# Altium PCB 400059.PcbDoc
Units mil, origin at the board's own origin, x right, y up, seen from the top; angles counter-clockwise.
Board outline 1005.56 x 903.71 mil, 2 copper layers (Top Layer, Bottom Layer), stack 65.792 mil thick; 38 components, 33 nets, 149 pads, 33 vias.
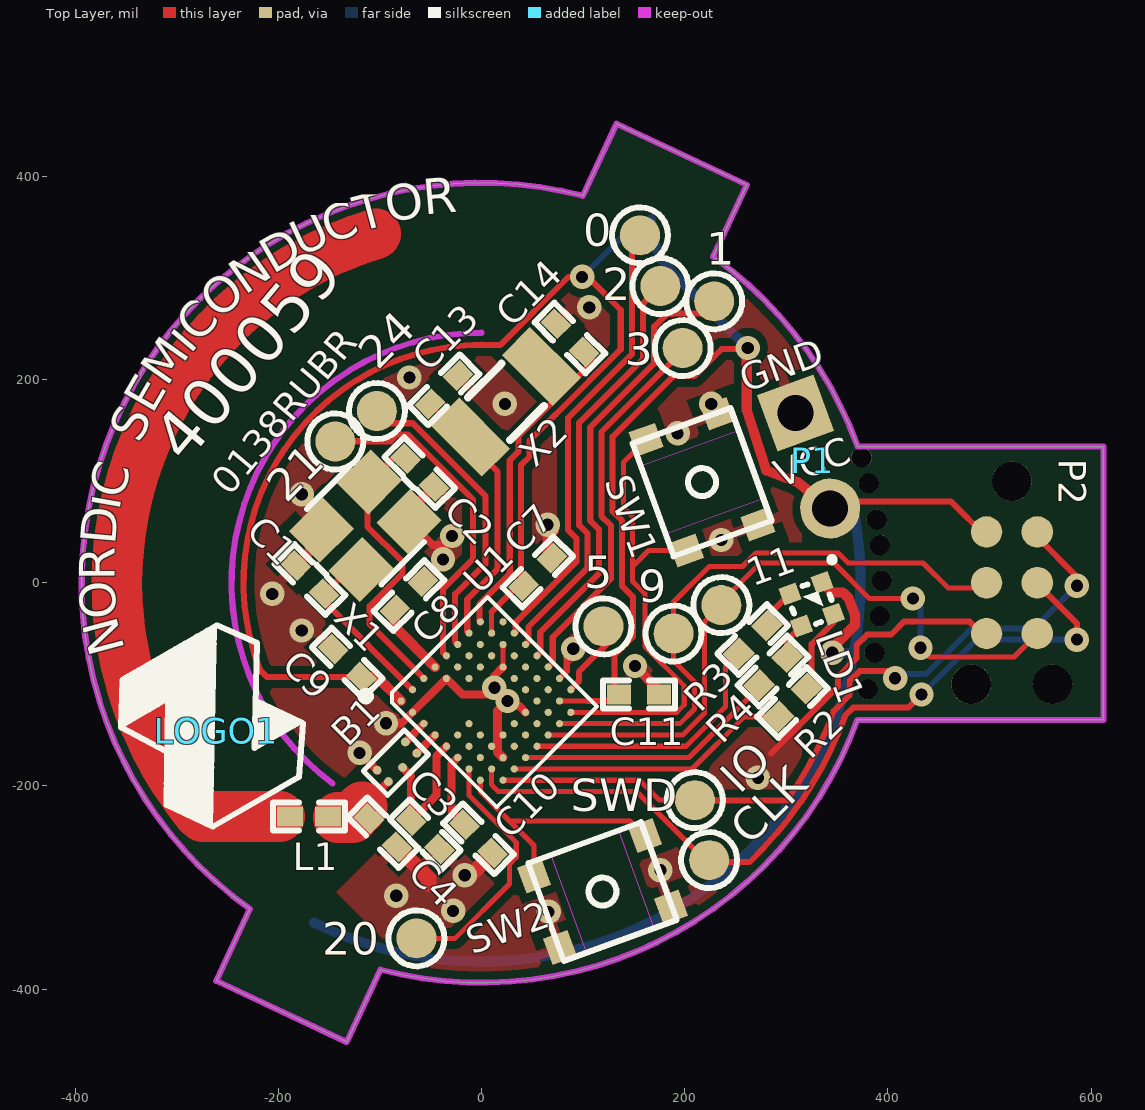
[diagram p0: Top Layer view]
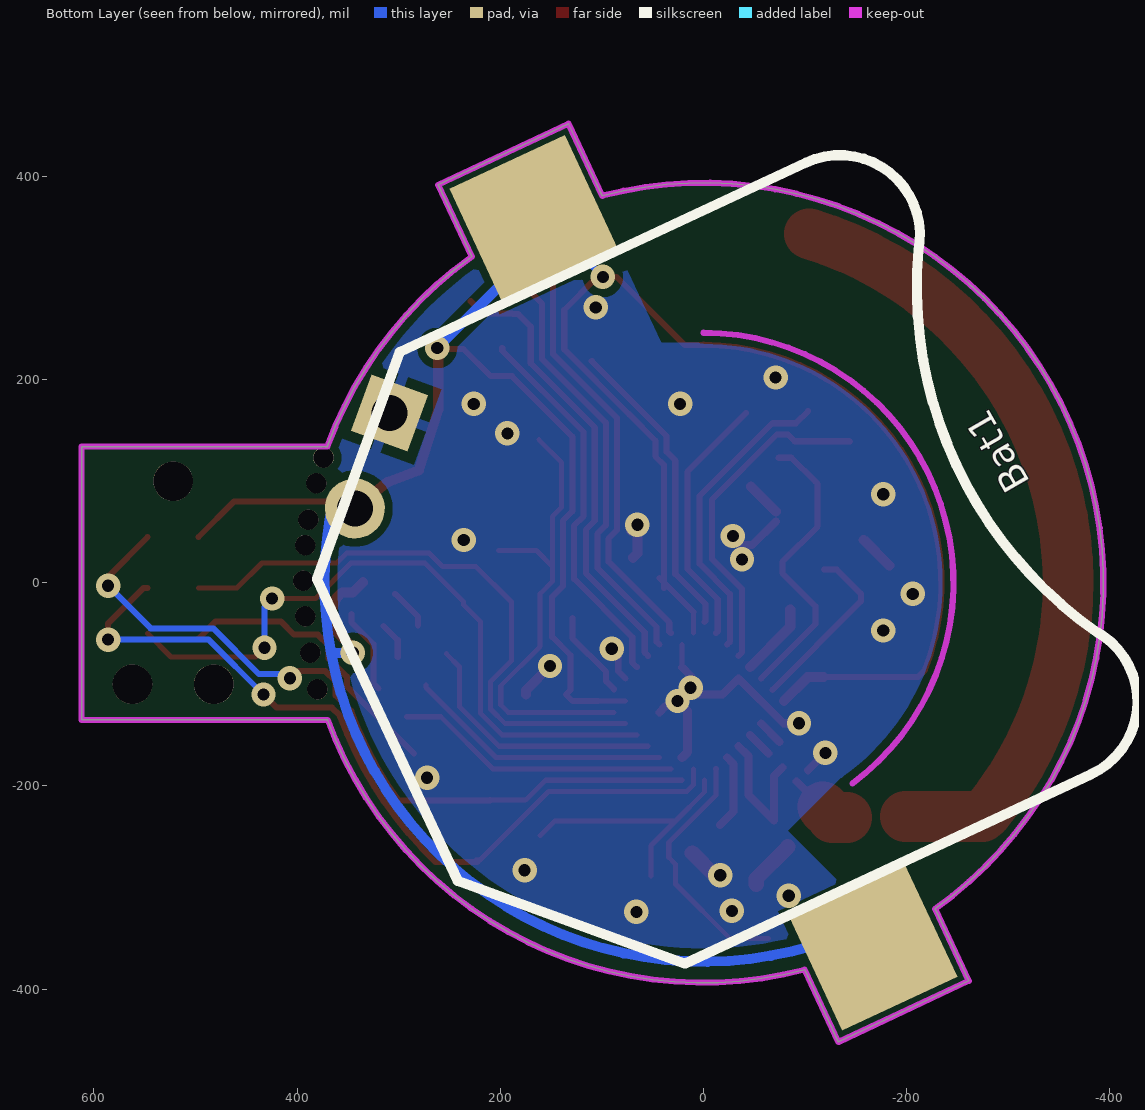
[diagram p1: Bottom Layer view, seen from below]
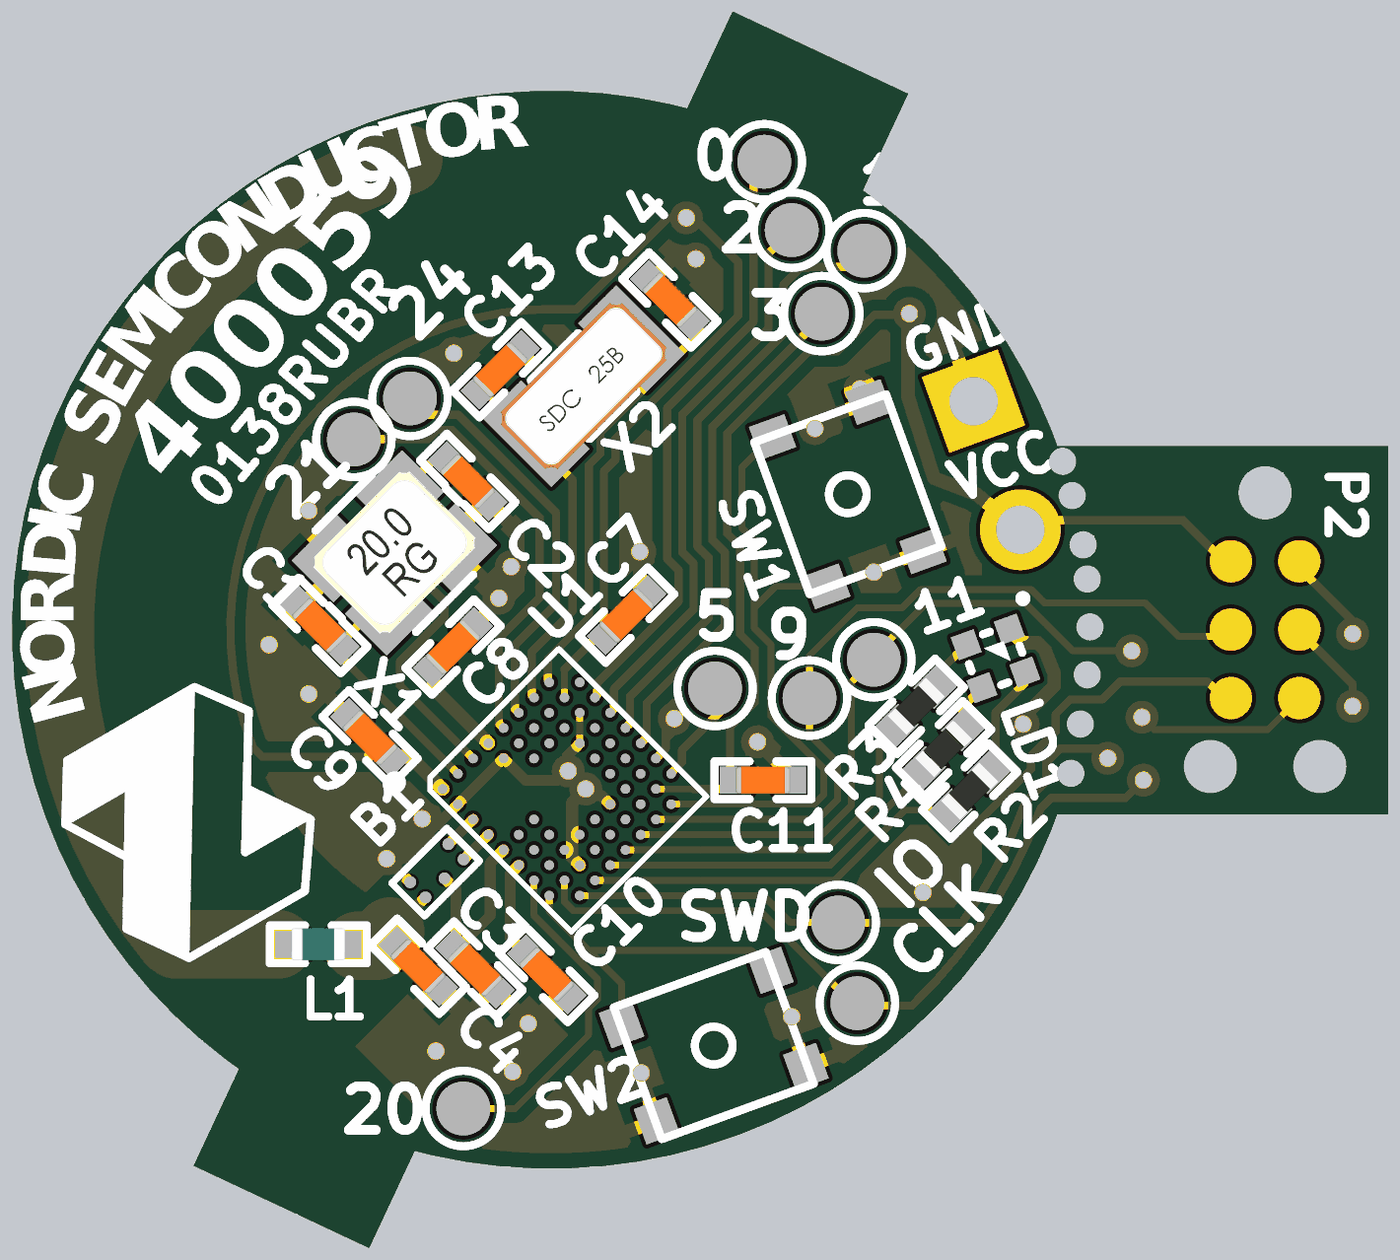
[diagram p2: 3D render of the assembled board from above, using the file's embedded part models]

## Layer stack, top to bottom
Top Layer: signal copper 1.4
Dielectric: core 62.9921, FR-4, Dk 4.8
Bottom Layer: signal copper 1.4

## Board outline
-261.11,-391.79 -132.83,-451.93 -99.54,-380.91 -99.54,-380.92 ccw(c0.15,-0.05) 370,-135 612,-135 612,134 370,134 370.17,134.06 ccw(c0,0) 227.95,321 261.07,391.65 132.79,451.78 99.5,380.77 99.54,380.91 ccw(c0,0) -227.95,-321 -227.99,-321.14

## Design rules (kind name [scope] priority, off if disabled: settings)
Clearance Polygon_Clearance [(InNamedPolygon('Top_Layer-GND')) or (InNamedPolygon('Bottom_Layer-GND'))] p1: gap=8
Clearance [All] p2: gap=5
ComponentClearance [All] p1 off: gap=10 collisioncheckmode=3 verticalgap=10 showdistances=FALSE
FabricationTestPointUsage TestPointUsage [All] p1: valid=0 allowmultiple=FALSE
FabricationTestpoint Testpoint [All] p1: side=3 testpointundercomponent=TRUE minsize=40 maxsize=100 preferedsize=60 minholesize=0 maxholesize=40 preferedholesize=32 testpointgrid=1 allowsidetop=TRUE allowsidebottom=TRUE usegrid=TRUE gridtolerance=0.01
Height [All] p1 off: minheight=0 maxheight=1000 prefheight=500
HoleSize [All] p1: absolutevalues=TRUE maxlimit=100 minlimit=12 maxpercent=80.000 minpercent=20.000
MinimumAnnularRing [All] p1 off: minimumring=8
PolygonConnect PolygonConnect_1 [isVia and innet(gnd)] p1: connectstyle=Direct reliefconductorwidth=10 reliefentries=4 polygonreliefangle="90 Angle" airgapwidth=10
PolygonConnect [All] p2: connectstyle=Relief reliefconductorwidth=10 reliefentries=4 polygonreliefangle="90 Angle" airgapwidth=10
RoutingVias [All] p1: holewidth=16 width=32 viastyle="Through Hole" minholewidth=10 minwidth=10 maxholewidth=28 maxwidth=50
SilkToSolderMaskClearance SilkscreenOverComponentPads [IsPad] p1: minsilkscreentomaskgap=10 clearancetoexposedcopper=TRUE
SolderMaskExpansion [All] p1: expansion=3
Width [All] p1: maxlimit=10000 minlimit=5 preferedwidth=6 bottomlayer_minwidth=6 minimp=50.000000 maximp=50.000000 favimp=50.000000
22 further rules are at their usual default settings.

## Components (designator, comment, footprint, x,y, rotation, side; value= is the part's Value field where it differs from the comment)
0 "Ø1.0mm,SMD" TP_SMD_Ø1.0mm 156,342 r0 top
1 "Ø1.0mm,SMD" TP_SMD_Ø1.0mm 229,277 r0 top
2 "Ø1.0mm,SMD" TP_SMD_Ø1.0mm 176,292 r0 top
3 "Ø1.0mm,SMD" TP_SMD_Ø1.0mm 198,231 r0 top
5 "Ø1.0mm,SMD" TP_SMD_Ø1.0mm 120,-43 r0 top
9 "Ø1.0mm,SMD" TP_SMD_Ø1.0mm 189,-50 r0 top
11 "Ø1.0mm,SMD" TP_SMD_Ø1.0mm 236,-22 r0 top
20 "Ø1.0mm,SMD" TP_SMD_Ø1.0mm -64,-350 r0 top
21 "Ø1.0mm,SMD" TP_SMD_Ø1.0mm -144,139 r0 top
24 "Ø1.0mm,SMD" TP_SMD_Ø1.0mm -103,169 r0 top
B1 "BAL-NRF02D3" BAL-ST-WLCSP -83.31,-176.24 r225 top
Bat1 "*" CR1632_HOLDER_SMD 0,0 r245 bottom locked
C1 "12pF" CAPC1005X04L -168.96,3.06 r315 top
C2 "12pF" CAPC1005X04L -60.77,108.42 r135 top
C3 "2.2nF" CAPC1005X04L -55.47,-248.03 r135 top
C4 "1.2pF" CAPC1005X04L -97,-246 r135 top
C7 "100nF" CAPC1005X04L 55.39,10.61 r225 top
C8 "100nF" CAPC1005X04L -71.56,-12.68 r45 top (schematic designator C10)
C9 "1.0nF" CAPC1005X04L -132.19,-78.97 r315 top (schematic designator C8)
C10 "47nF" CAPC1005X04L -3,-252 r135 top (schematic designator C11)
C11 "100nF" CAPC1005X04L 155,-110 r180 top (schematic designator C12)
C13 "12pF" CAPC1005X04L -37,190 r225 top
C14 "12pF" CAPC1005X04L 87,241 r315 top
CLK "Ø1.0mm,SMD" TP_SMD_Ø1.0mm 224,-273 r0 top
IO "Ø1.0mm,SMD" TP_SMD_Ø1.0mm 210,-214 r180 top
L1 "2.2nH" INDC1005X04L -170,-230 r180 top
LD1 "LED RGB" SML-LX0404SIUPGUSB 325,-21 r20 top
LOGO1 "Nordic Logo M" NORDIC_LOGO_M -261.04,-145.74 r120 top (schematic designator LOGO)
P1 "Pin List 1x2" LIST_1x2 326,120 r290 top locked
P2 "TC2030-CTX-NL" TC2030-IDC-NLFP 522,0 r270 top
R2 "2k2" RESC1005X04L 306,-118 r45 top
R3 "680R" RESC1005X04L 267,-56 r45 top
R4 "820R" RESC1005X04L 287,-87 r45 top
SW1 "PB SW" SW_TACTILE_2.6x3.0MM_4-LEAD 217,99 r110 top
SW2 "PB SW" SW_TACTILE_2.6x3.0MM_4-LEAD 119,-304 r20 top
U1 "nRF51822-CEAA" BGA62C40P9X9_383X350X55 9.93,-116.44 r45 top
X1 "16MHz" BT-XTAL_2520 -114.51,56.09 r45 top
X2 "32.768kHz" FC-135 24,178 r45 top

## Footprints (in the part's own frame and the unit in brackets; to place one, negate y for a bottom-side part, rotate by r counter-clockwise, add the part's x,y. Pads: shape width x height; smd on the part's side, far side on the other; paste and mask are expansions set on the pad)
BAL-ST-WLCSP [mm]
  round 0.22 smd mask+0.05: A1(0.5,0.2) A2(0,0.2) A3(-0.5,0.2) B1(0.5,-0.2) B3(-0.5,-0.2)
  Top Layer pour cut-out: -0.697,-0.43 0.756,-0.43 0.756,0.44 -0.697,0.44
  silkscreen extent -0.69,-0.43 0.76,0.43, body extent -0.7,-0.43 0.76,0.43, height 0.63
BGA62C40P9X9_383X350X55 [mm] "BGA, 62-Leads, Body 3,8x3,5mm,  Pitch 0,40mm"
  round 0.18 smd mask+0.102: A1(-1.6,1.6)
  round 0.18 smd: A2(-1.2,1.6) A3(-0.8,1.6) A4(-0.4,1.6) A5(0,1.6) A6(0.4,1.6) A7(0.8,1.6) A8(1.2,1.6) B1(-1.6,1.2) B4(-0.4,1.2) B5(0,1.2) B6(0.4,1.2) B7(0.8,1.2) B8(1.2,1.2) B9(1.6,1.2) C1(-1.6,0.8) C5(0,0.8) C6(0.4,0.8) C7(0.8,0.8) C8(1.2,0.8) C9(1.6,0.8) D1(-1.6,0.4) D7(0.8,0.4) D8(1.2,0.4) D9(1.6,0.4) E1(-1.6,0) E2(-1.2,0) E3(-0.8,0) E7(0.8,0) E8(1.2,0) E9(1.6,0) F1(-1.6,-0.4) F2(-1.2,-0.4) F3(-0.8,-0.4) F7(0.8,-0.4) F8(1.2,-0.4) F9(1.6,-0.4) G1(-1.6,-0.8) G2(-1.2,-0.8) G3(-0.8,-0.8) G4(-0.4,-0.8) G5(0,-0.8) G6(0.4,-0.8) G7(0.8,-0.8) G8(1.2,-0.8) G9(1.6,-0.8) H1(-1.6,-1.2) H2(-1.2,-1.2) H3(-0.8,-1.2) H4(-0.4,-1.2) H5(0,-1.2) H6(0.4,-1.2) H7(0.8,-1.2) H8(1.2,-1.2) H9(1.6,-1.2) J2(-1.2,-1.6) J3(-0.8,-1.6) J4(-0.4,-1.6) J5(0,-1.6) J6(0.4,-1.6) J7(0.8,-1.6) J8(1.2,-1.6)
  silkscreen extent -2.24,-1.96 1.76,2.42, body extent -1.79,-1.96 1.76,1.92, height 0.51
BT-XTAL_2520 [mm] "TSX-2520"
  rect 1.2x1.1 smd: 1(-0.85,-0.7) 2(0.85,-0.7) 3(0.85,0.7) 4(-0.85,0.7)
  silkscreen extent -1.55,-1.33 1.53,1.32, body extent -1.25,-1 1.27,1, height 0.56
CAPC1005X04L [mm] "Chip Capacitor, 2-Leads, Body 1.0x0.5mm, IPC High Density"
  rect 0.6x0.5 smd: 1(-0.5,0) 2(0.5,0)
  silkscreen extent -0.9,-0.35 0.9,0.35, body extent -0.51,-0.25 0.51,0.25, height 0.5
CR1632_HOLDER_SMD [mm] "CR1632 - SMD mount coin cell bat holder"
  round 13 on Bottom Solder: 0(0,0)
  rect 3.18x3.18 smd: 1(-10.02,0) 1(10.02,0)
  silkscreen extent -8.44,-8.72 8.44,8.76
FC-135 [mm] "EPSON TOYOCOM - FC-135 32.768KHZ ±20PPM,9.0PF - CRYSTAL, SM, WATCH"
  rect 1x1.8 smd: 1(-1.25,0) 2(1.25,0)
  silkscreen extent -0.6,-0.75 0.6,0.75, body extent -1.6,-0.75 1.6,0.75, height 0.81
INDC1005X04L [mm] "Chip Inductor, 2-Leads, Body 1.0x0.5mm, IPC High Density"
  rect 0.65x0.5 smd: 1(-0.475,0) 2(0.475,0)
  silkscreen extent -0.9,-0.35 0.9,0.35, body extent -0.5,-0.3 0.5,0.3, height 0.5
LIST_1x2 [mm] "Pin List, 2.54mm through hole"
  rect 1.5x1.5 hole 0.9: 1(-1.27,0)
  round 1.5 hole 0.9: 2(1.27,0)
NORDIC_LOGO_M [mil] "Medium Nordic Logo"
  silkscreen extent -80,-78 90,80
RESC1005X04L [mm] "Chip Resistor, 2-Leads, Body 1.0x0.5mm, IPC High Density"
  rect 0.6x0.55 smd: 1(-0.5,0) 2(0.5,0)
  silkscreen extent -0.88,-0.38 0.88,0.38, body extent -0.5,-0.25 0.5,0.25, height 0.3
SML-LX0404SIUPGUSB [mm]
  rect 0.45x0.45 smd paste+0: 1(0.425,-0.425) 2(-0.425,0.425) 3(-0.425,-0.425) 4(0.425,0.425)
  silkscreen extent -0.5,-0.5 0.92,0.93, body extent -0.5,-0.5 0.5,0.5, height 0.25
SW_TACTILE_2.6x3.0MM_4-LEAD [mm] "2.6×3.0mm TACT Switch, without ground connector"
  rect 0.65x0.7 smd: 1(-1.475,0.95) 1(1.475,0.95) 2(-1.475,-0.95) 2(1.475,-0.95)
  Top Layer keep-out region: -0.9,-1.3 0.9,-1.3 0.9,1.3 -0.9,1.3
  silkscreen extent -1.5,-1.3 1.5,1.3, body extent -1.6,-1.3 1.6,1.3, height 0.65
TC2030-IDC-NLFP [mil]
  round 39 hole 39 unplated: 0(-100,0) 0(100,40) 0(100,-40)
  round 31 smd paste-196.85: 1(-50,-25) 2(-50,25) 3(0,-25) 4(0,25) 5(50,-25) 6(50,25)
  Top Layer pour cut-out: -50,25 -50,-25 50,-25 50,25
TP_SMD_Ø1.0mm [mm]
  round 1 smd: 1(0,0)
  silkscreen extent -0.7,-0.7 0.7,0.7

## Part data
0 1 2 3 5 9 11 20 21 24 CLK IO: library part TP_SMD_Ø1.0MM, "1.0mm circular SMD testpad"
B1: "50 ohm balun transformer for 2.45GHz ISM"
Bat1: library part "Bat Holder CR1632 SMD", "Bat Holder CR1632 SMD"
C1 C2 C13 C14: library part C0402-12p, "Capacitor, NP0, ±2%"
C3: library part C0402-2n2, "Capacitor, X7R, ±10%"
C4: library part C0402-1.2p, "Capacitor, NP0, ±0.1pF"
C7 C8 C11: library part C0402-100n, "Capacitor, X7R, ±10%"
C9: library part C0402-1n0, "Capacitor, X7R, ±10%"
C10: library part C0402-47n, "Capacitor, X7R, ±10%"
L1: library part L0402-2n2, "Inductor, 220mA, ±0.1nH"
LD1: library part SML-LX0404SIUPGUSB, "RGB LED 1.00 mm x 1.00 mm SMD"
LOGO1: "Nordic Logo, medium size"
P1: "Pin List 1x2, 2.54mm (100mil)"
P2: "CBL PLUG-OF-NAILS 6-PIN"
R2: library part R0402-2k2, "Resistor, ±1%, 0.063W"
R3: library part R0402-680, "Resistor, ±1%, 0.063W"
R4: library part R0402-820, "Resistor, ±1%, 0.063W"
SW1 SW2: library part "KMT021 NGJ LHS", "Nano-Miniature Top Actuated Tact Switch with extended life 3.0x2.6mm"
U1: library part nRF51822-CEAAD0, "Multi-protocol Bluetooth Low Energy and 2.4GHz proprietary system-on-chip"
X1: library part NX2520SA-16MHZ-STD-CSW-5, "XTAL SMD 2520, 16MHz, 8pF, ±15ppm"
X2: library part "XTAL_FC-135 32.768k", "EPSON TOYOCOM - FC-135 32.768KHZ ±20PPM,9.0PF - CRYSTAL, SM, WATCH"

## Free pads (board coordinates)
  round 20 hole 20 unplated: 3(374,123) 3(380,-105) 3(381,98) 3(387,-69) 3(389,62) 3(392,-33) 3(392,37) 3(394,2)

## Via types
v1: diameter 24, hole 12, Top Layer to Bottom Layer, tented both sides, 33 vias

## Nets (pads, with @x,y where several pads share a name; then routed paths per layer and width w, separated by ;. In a path a pad name is that pad's centre, name@x,y a point inside that pad or via, vN(x,y) a via of type N, cw(c..) or ccw(c..) an arc to the next point about the centre after c; other vN are vias at no path point)
ANT: L1.2 | length 780.5
  Top Layer w50: -277.41,-227.87 cw(c0,0) -104.17,343.55 ; -274.36,-230 L1.2@-199,-230
GND: B1.B1 C1.1 C2.1 C3.1 C4.1 C7.1 C8.2 C9.1 C10.1 C11.1 C13.1 C14.1 P1.1 P2.5 SW1.2 SW2.2 U1.B1 U1.B4 U1.C8 U1.D7 U1.G3 U1.G4 U1.G6 U1.G9 U1.H3 X1.2 X1.4 | length 914.9
  Top Layer w5: U1.D7 U1.C8
  Top Layer w6: U1.G9 83.83,-87.09 83.83,-69.43 v1@89.63,-63.63 ; 285,-168 351,-102 351,-92.49 369,-74.49 369,-61.54 379.54,-51 403,-51 416,-38 480,-38 P2.5@497,-55
  Top Layer w8: v1(-120.03,-167.47) B1.B1@-102.89,-184.61 ; v1(-94.08,-138.29) -78.74,-138.29 U1.B4 -18.78,-110 5.07,-110 v1@12.06,-103.01 ; X1.2 -48.09,37 v1@-36.02,37 ; U1.D7@20.8,-83.3 12.06,-92.04 v1@12.06,-103.01 ; U1.G6 37.2,-121.44 30.49,-121.44 v1(25.5,-116.44) 15.42,-106.36 18.77,-103.01 v1@12.06,-103.01 ; v1@149.02,-85.98 v1@151,-84
  Top Layer w9: U1.H3 15.6,-166.65 15.6,-126.34 v1(25.5,-116.44)
  Top Layer w10: C1.1 X1.4@-157.66,42.19 ; X1.2@-71.36,69.99 C2.1 ; v1(65,57) 65,28.84 C7.1 ; v1@69.31,52.69 v1@71,51 ; v1(151,-82) 174.68,-105.68 C11.1
  Top Layer w15: C4.1 -52,-291 -52,-297 ; v1(-16.53,-287.89) -11.05,-287.89 C10.1
  other v1: 66,-324 -28,-323 -84,-308 176,-283 272,-192 12.64,-103.35 90.21,-65.05 -177,-47 -206,-11 -38,23 236,42 -29,46 -177,87 193,147 23,176 226,176 -71,202 106,271
NetB1_A2: B1.A2 C3.2 U1.E1 | length 143.3
  Top Layer w8: B1.A2 -69.39,-190.16 C3.2 -44.36,-209.08 -44.36,-170.74 U1.E1
NetB1_A3: B1.A3 U1.D1 | length 25.6
  Top Layer w8: B1.A3@-63.86,-167.97 U1.D1
NetB1_B3: B1.B3 U1.C1 | length 25.5
  Top Layer w8: B1.B3 U1.C1
NetC1_2: C1.2 U1.A2 X1.1 | length 176.7
  Top Layer w6: X1.1 -131.23,12.94 C1.2 -155.04,-18.29 U1.A2
NetC2_2: C2.2 U1.A3 X1.3 | length 290.5
  Top Layer w6: C2.2@-73.98,123.04 -86.53,123.04 X1.3 -112.37,97.2 -112.37,55.15 -77.67,20.44 -77.67,9.49 -110.27,-23.11 -110.27,-40.79 U1.A3
NetC8_1: C8.1 U1.A4 | length 72.9
  Top Layer w10: C8.1 -85.48,-43.31 U1.A4
NetC10_2: C10.2 U1.F1 | length 74.4
  Top Layer w8: U1.F1 -29.66,-178.3 -29.66,-225.34 C10.2@-16.48,-238.51
NetLD1_1: LD1.1 R2.2 | length 84.1
  Top Layer w6: R2.2 324.93,-99.07 324.93,-60.48 346.45,-38.96 LD1.1
NetLD1_2: LD1.2 R3.2 | length 40.5
  Top Layer w6: R3.2 280.92,-33.63 LD1.2
NetLD1_3: LD1.3 R4.2 | length 36.5
  Top Layer w6: R4.2 300.92,-56.53 LD1.3
P0.00: 0.1 U1.C9 | length 449.7
  Top Layer w6: U1.C9 33.61,-48.22 33.61,-39.04 93.25,20.6 93.25,43.68 85,51.93 85,162.02 148,225.02 148,334 0.1
P0.01: 1.1 U1.E9 | length 448.3
  Top Layer w6: U1.E9 58.05,-68.33 57.8,-68.09 57.8,-48.78 115.48,8.89 115.48,52.57 107,61.05 107,152.91 170,215.91 170,252 182.31,264.31 187.47,264.31 188.15,265 217,265 1.1
P0.02: 2.1 U1.D9 | length 414.6
  Top Layer w6: U1.D9 46.05,-58.06 46.05,-43.57 104.33,14.71 104.33,48.16 96,56.49 96,157.46 159,220.46 159,275 2.1
P0.03: 3.1 U1.F9 | length 376.5
  Top Layer w6: U1.F9 70.05,-78.6 70.05,-53.51 127.25,3.69 127.25,56.35 118,65.6 118,148.35 198,228.35 3.1
P0.05: 5.1 U1.H9 | length 87.5
  Top Layer w6: U1.H9@87.88,-104.97 U1.H9@88.41,-104.44 ; U1.H9@87.88,-104.44 U1.H9@88.41,-104.44 ; 5.1@129,-35 129,-54.67 95.83,-87.84 95.83,-97.03 U1.H9@88.41,-104.44
P0.08: SW1.1 U1.J8 | length 469.3
  Top Layer w5: U1.J8 192.13,-127.58 199.5,-120.21 199.5,-101.5 160.7,-62.7 160.7,-10.85 148.75,1.1 148.75,16 ; SW1.1@161.99,140.78 139.5,118.28 139.5,74.51 148.75,65.26 148.75,16 ; SW1.1@201.72,31.64 164.39,31.64 148.75,16
P0.09: 9.1 P2.3 U1.J7 | length 594.8
  Top Layer w5: U1.J7 195.14,-138.72 209.5,-124.35 209.5,-97.36 189,-76.86 9.1 189,-19 224.07,16.07 256.93,16.07 270.16,29.3 350.99,29.3 360.79,19.5 434.5,19.5 459,-5 P2.3@497,-5
P0.11: 11.1 P2.6 U1.J6 | length 663.3
  Top Layer w5: U1.J6 198.14,-149.85 219.5,-128.49 219.5,-38.5 11.1 236,-19 274.3,19.3 346.84,19.3 381.64,-15.5 v1(424.5,-15.5) ; v1@434,-66 441,-73 524,-73 P2.6
  Bottom Layer w6: v1(432,-64) v1@432,-24
P0.12: R3.1 U1.J5 | length 259.3
  Top Layer w5: U1.J5 201.15,-160.99 240,-122.14 240,-83 R3.1
P0.15: R4.1 U1.J4 | length 260.6
  Top Layer w5: U1.J4 204.16,-172.12 273.08,-103.2 R4.1
P0.16: R2.1 U1.J3 | length 281.1
  Top Layer w5: U1.J3 207.16,-183.26 258.5,-131.92 R2.1
P0.18: SW2.1 U1.H1 | length 255.5
  Top Layer w5: U1.H1 -1.2,-202.01 -1.2,-205.8 27.5,-234.5 ; SW2.1@51.64,-288.72 51.64,-258.64 27.5,-234.5 ; SW2.1@160.78,-248.99 146.28,-234.5 27.5,-234.5
P0.20: 20.1 U1.G1 | length 248.9
  Top Layer w5: 20.1 -26,-350 27.4,-296.6 27.4,-277.04 34.17,-270.27 34.17,-255.66 -12.34,-209.15 U1.G1
P0.21: 21.1 U1.A5 | length 332.8
  Top Layer w6: 21.1 -143.75,139.25 -89.75,139.25 -83,146 -72.42,146 -8.24,81.82 -8.24,23.55 -38.08,-6.3 -38.08,-68.43 U1.A5
P0.24: 24.1 U1.A6 | length 301.2
  Top Layer w6: 24.1 -91,157 -67.86,157 -58.06,147.2 -58,147.2 3.76,85.43 3.76,18.57 -26.08,-11.27 -26.32,-11.51 -26.32,-57.92 U1.A6
RF: B1.A1 C4.2 L1.1 | length 64
  Top Layer w8: -117.41,-220.59 B1.A1@-91.75,-195.75
  Top Layer w50: L1.1@-141.14,-231 -127,-231 ; -127.41,-230.59 -117.41,-220.59
SWDCLK: CLK.1 P2.4 U1.H2 | length 803.5
  Top Layer w5: U1.H2 9.93,-199 16.37,-205.44 152.46,-205.44 220.03,-273 CLK.1
  Top Layer w6: CLK.1@222.58,-274.42 222.58,-274.85 263.85,-274.85 ccw(c0,0) 357.68,-131.25 ; 358.05,-130.6 365.65,-123 420,-123 v1(433,-110) ; P2.4@547,-5 551,-5 586,-40 v1(586,-56)
  Bottom Layer w6: v1(433,-110) 487,-56 v1(586,-56)
SWDIO: IO.1 P2.2 U1.J2 | length 765.9
  Top Layer w5: U1.J2 155.56,-194.39 175.17,-214 IO.1
  Top Layer w6: IO.1 210.29,-214.29 300.4,-214.29 ccw(c0,0) 346.64,-126.49 ; 346.5,-126.5 362,-111 362,-97.04 362.5,-96.54 372.04,-87 v1@400,-87 ; v1(407,-94) v1@400,-87 ; v1@410,-87 v1@400,-87 ; P2.2@547,45 586,6 v1(586,-3)
  Bottom Layer w6: v1(407,-94) 411,-90 437.44,-90 482.44,-45 544,-45 v1(586,-3)
VCC_NRF: Bat1.1 C7.2 C9.2 C11.2 LD1.4 P1.2 P2.1 U1.A1 U1.B8 U1.H8 | length 3250.1
  Top Layer w5: U1.B8 9.93,-28.77 ; U1.H8 104,-116.44
  Top Layer w6: C9.2 -210.99,-92.89 -217.91,-85.96 cw(c0,0) 0,234.25 0,234.16 18.73,234.16 85.58,301 v1(99,301) ; 9.93,-28.77 C7.2@43.4,4.69 ; C7.2@38.76,-5 38.76,115.78 47.18,124.2 47.18,139.78 73.22,165.82 ; 73.25,165.82 137,229.58 137,268.42 v1@104.42,301 ; 104,-116.44 128.87,-116.44 C11.2 131,-105.69 131,-71.15 149,-53.15 149,-14 138.25,-3.25 138.25,60.91 129,70.16 129,143.79 188.52,203.31 209.47,203.31 236.21,230.05 v1@261.05,230.05 ; P1.2@348,80 462,80 P2.1@497,45
  Top Layer w10: C9.2 -102.71,-92.89 U1.A1 ; v1@261.05,230.05 261.05,170 280.07,110.7 311,99 P1.2 P1.2@333.23,73.02 ; LD1.4 345.09,-9.65 355.88,-9.65 361,-14.76 367.8,-32 367.8,-41.2 345.09,-63.91 v1(345.09,-69) ; P1.2@335,59.92 P1.2@340.1,65.02
  Bottom Layer w6: v1(99,301) 155.53,357.53 Bat1.1@166.72,357.53
  Bottom Layer w10: Bat1.1@-164.82,-334.61 ccw(c0,0) 366.58,-68.92 ; Bat1.1@166.72,357.53 ccw(c242.15,357.53) Bat1.1@188.78,304.22 ; Bat1.1@188.81,304.19 v1(262,231) ; v1(345.09,-69) 366.5,-69 366.58,-68.92 ; P1.2@364.31,80.07 cw(c0,0) 366.58,-68.92
XL1: C13.2 U1.A7 X2.1 | length 253.7
  Top Layer w6: -41.92,167.08 15.76,109.4 15.76,13.6 -14.08,-16.24 -14.08,-47.89 U1.A7
XL2: C14.2 U1.A8 X2.2 | length 303.3
  Top Layer w6: U1.A8 -2.08,-37.62 -2.08,-21.21 27.76,8.63 27.76,120.34 36.18,128.75 36.18,144.34 109.92,218.08
pads on no net: Bat1.0 P2.0 U1.B5 U1.B6 U1.B7 U1.B9 U1.C5 U1.C6 U1.C7 U1.D8 U1.E2 U1.E3 U1.E7 U1.E8 U1.F2 U1.F3 U1.F7 U1.F8 U1.G2 U1.G5 U1.G7 U1.G8 U1.H4 U1.H5 U1.H6 U1.H7

## Polygon pours and split planes (outlines as drawn)
GND on Top Layer "Top_Layer-GND" (solid, remove dead copper, pour order 8): 315,-431 -492.45,-431 -497.15,-429.19 -497.15,454.75 -503.01,457 312.65,457 315,457.91
GND on Bottom Layer "Bottom_Layer-GND" (solid, remove dead copper, pour order 7): 431,-446 -564.77,-446 -570.56,-444.11 -570.56,480.6 -577.8,482.96 428.11,482.96 431,483.91

## Keep-outs
Keep-Out Layer:
  lines w6: -228.05,-321.28 -261.17,-391.93 -132.89,-452.07 -99.59,-381.05 ; -227.93,-321.01 cw(c0,0) 99.54,380.91 ; -146.68,-197.57 cw(c0,0) 0,246.06 ; -99.54,-380.91 ccw(c0,0) 369.85,-134.95 ; 99.5,380.77 132.79,451.78 261.07,391.65 227.95,321 cw(c0,0) 370.17,134.06 ; 369.85,-135 612,-135 612,134 370,134

## Other copper
Top Layer:
  pour cut-out: -292.17,-244.17 -74.65,-461.69 -30.34,-417.32 -247.83,-199.83
  pour cut-out: 102.59,514.84 -27.42,236.04 41.42,235.96 159.41,488.34
  pour cut-out: -116,-173 -333.53,-390.53 -281.32,-442.66 -63.83,-225.17
  pour cut-out: 10.65,-218.97 113.18,-116.44 9.94,-13.21 -92.59,-115.74
  pour cut-out: -128.57,-204.22 -92.72,-168.37 -64.37,-196.72 -100.22,-232.57
Bottom Layer:
  pour cut-out: 102.59,514.84 -27.42,236.04 41.42,235.96 159.41,488.34
  pour cut-out: -135,-192 -333.53,-390.53 -281.32,-442.66 -82.83,-244.17

## Silkscreen, mask and mechanical layers (free items; w line width, h text height)
Top Overlay:
  text "R" at -55.64,350.19 h60 r5
  text "O" at -90.09,342.58 h60 r10
  text "T" at -116.84,333.64 h60 r15
  text "C" at -146.05,321.71 h60 r20
  text "U" at -173.03,309.44 h60 r25
  text "D" at -199.38,292.81 h60 r30
  text "N" at -225.96,272.84 h60 r35
  text "O" at -251.4,248.91 h60 r40
  text "C" at -271.52,225.75 h60 r45
  text "I" at -277.68,216.42 h60 r50
  text "GND" at 260,187 h27 r20
  text "M" at -299.99,185.07 h60 r55
  text "E" at -313.64,158.71 h60 r60
  text "S" at -325.42,131.12 h60 r65
  text "400059" at -280,106 h80 r50
  text "VCC" at 294,93 h27 r20
  text "0138RUBR" at -248,84 h27 r50
  text "C" at -341.93,77.71 h60 r75
  text "I" at -345.36,67.65 h60 r80
  text "D" at -348.81,35.63 h60 r85
  text "R" at -349.04,2.02 h60 r90
  text "O" at -346.89,-33.69 h60 r95
  text "N" at -339.32,-62.81 h60 r105
  text "SWD" at 88,-225 h32
Bottom Solder:
  lines w6: -227.95,-321 -261.07,-391.65 -132.79,-451.78 -99.5,-380.77
Mechanical 1:
  lines w6: -227.99,-321.14 -261.11,-391.79 -132.83,-451.93 -99.54,-380.91 ccw(c0.15,-0.05) 370,-135 ; -227.95,-321 cw(c0,0) 99.54,380.91 ; 99.5,380.77 132.79,451.78 261.07,391.65 227.95,321 cw(c0,0) 370.17,134.06 ; 369.85,-135 612,-135 612,134 370,134
Mechanical 2:
  lines w6: 369.99,-134.63 ccw(c0,-0.05) 370.27,133.74
Mechanical 3:
  circle w10: c0,0 r314.96